# EAGLE board STM32F446 Full Board SMD v7.1 (EAGLE 9.6.2), part 1 of 2
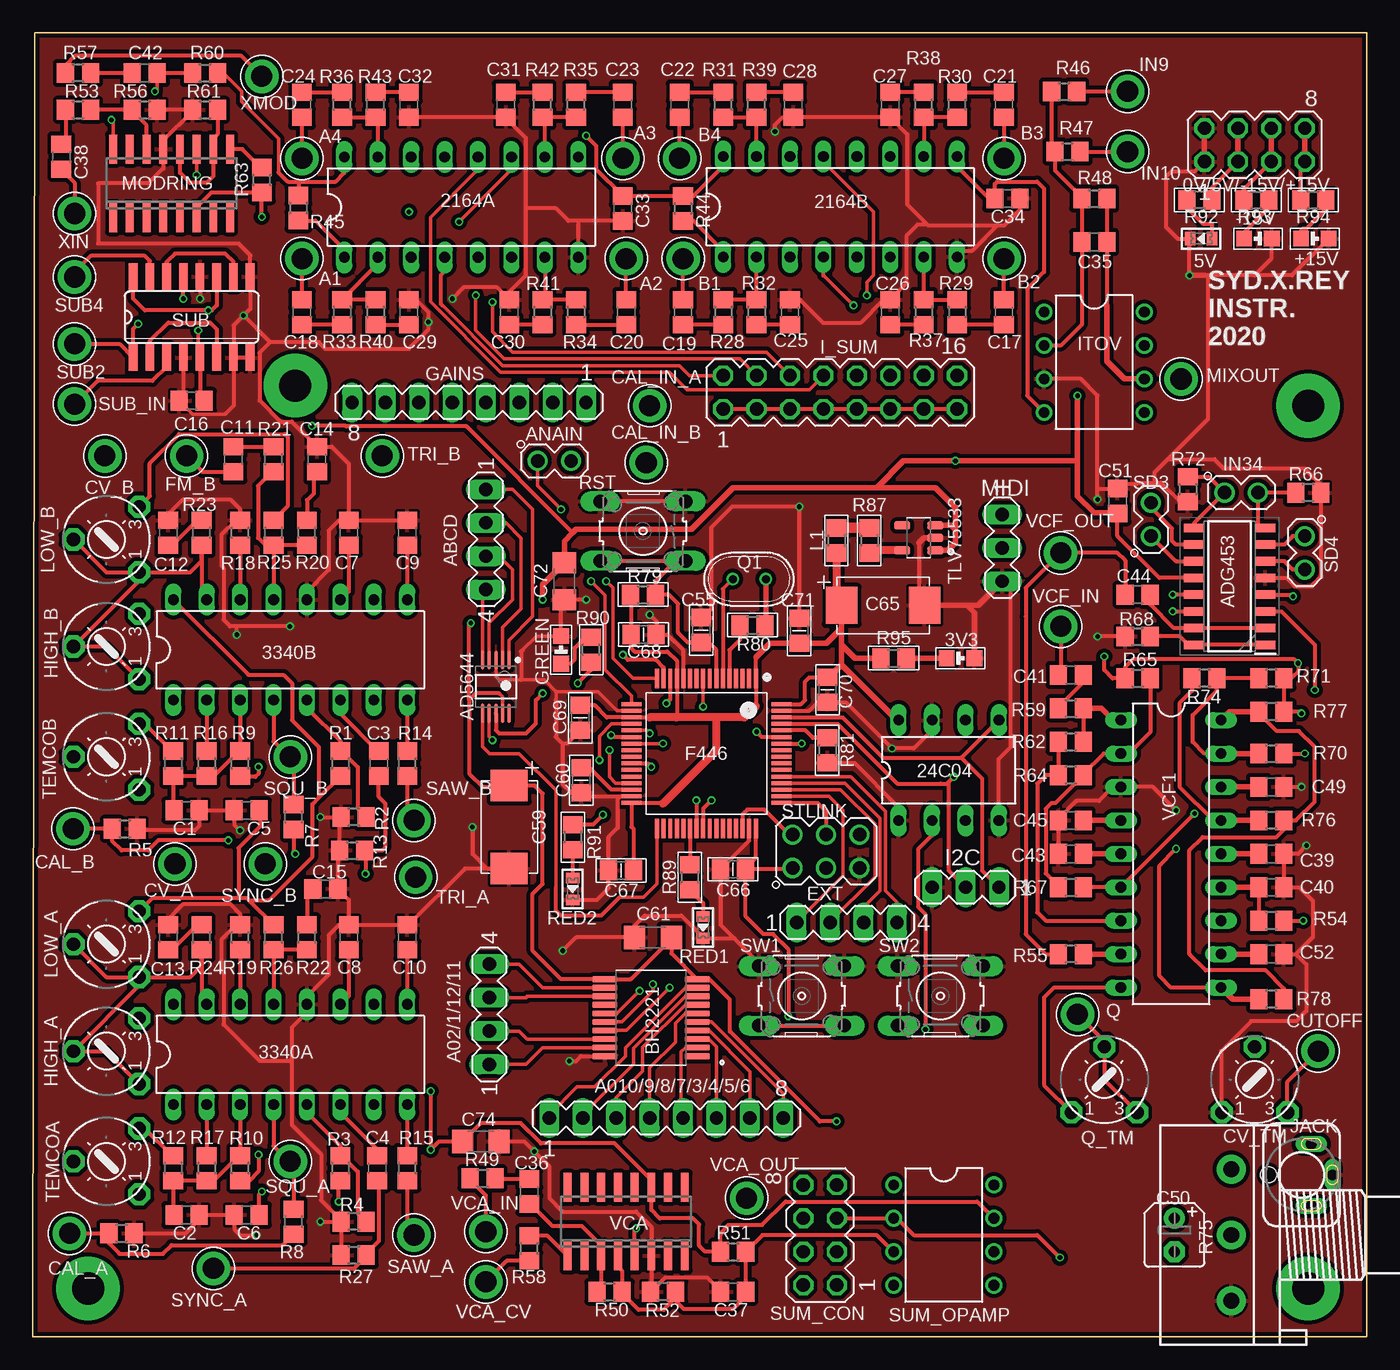
[diagram p0: board, top side]
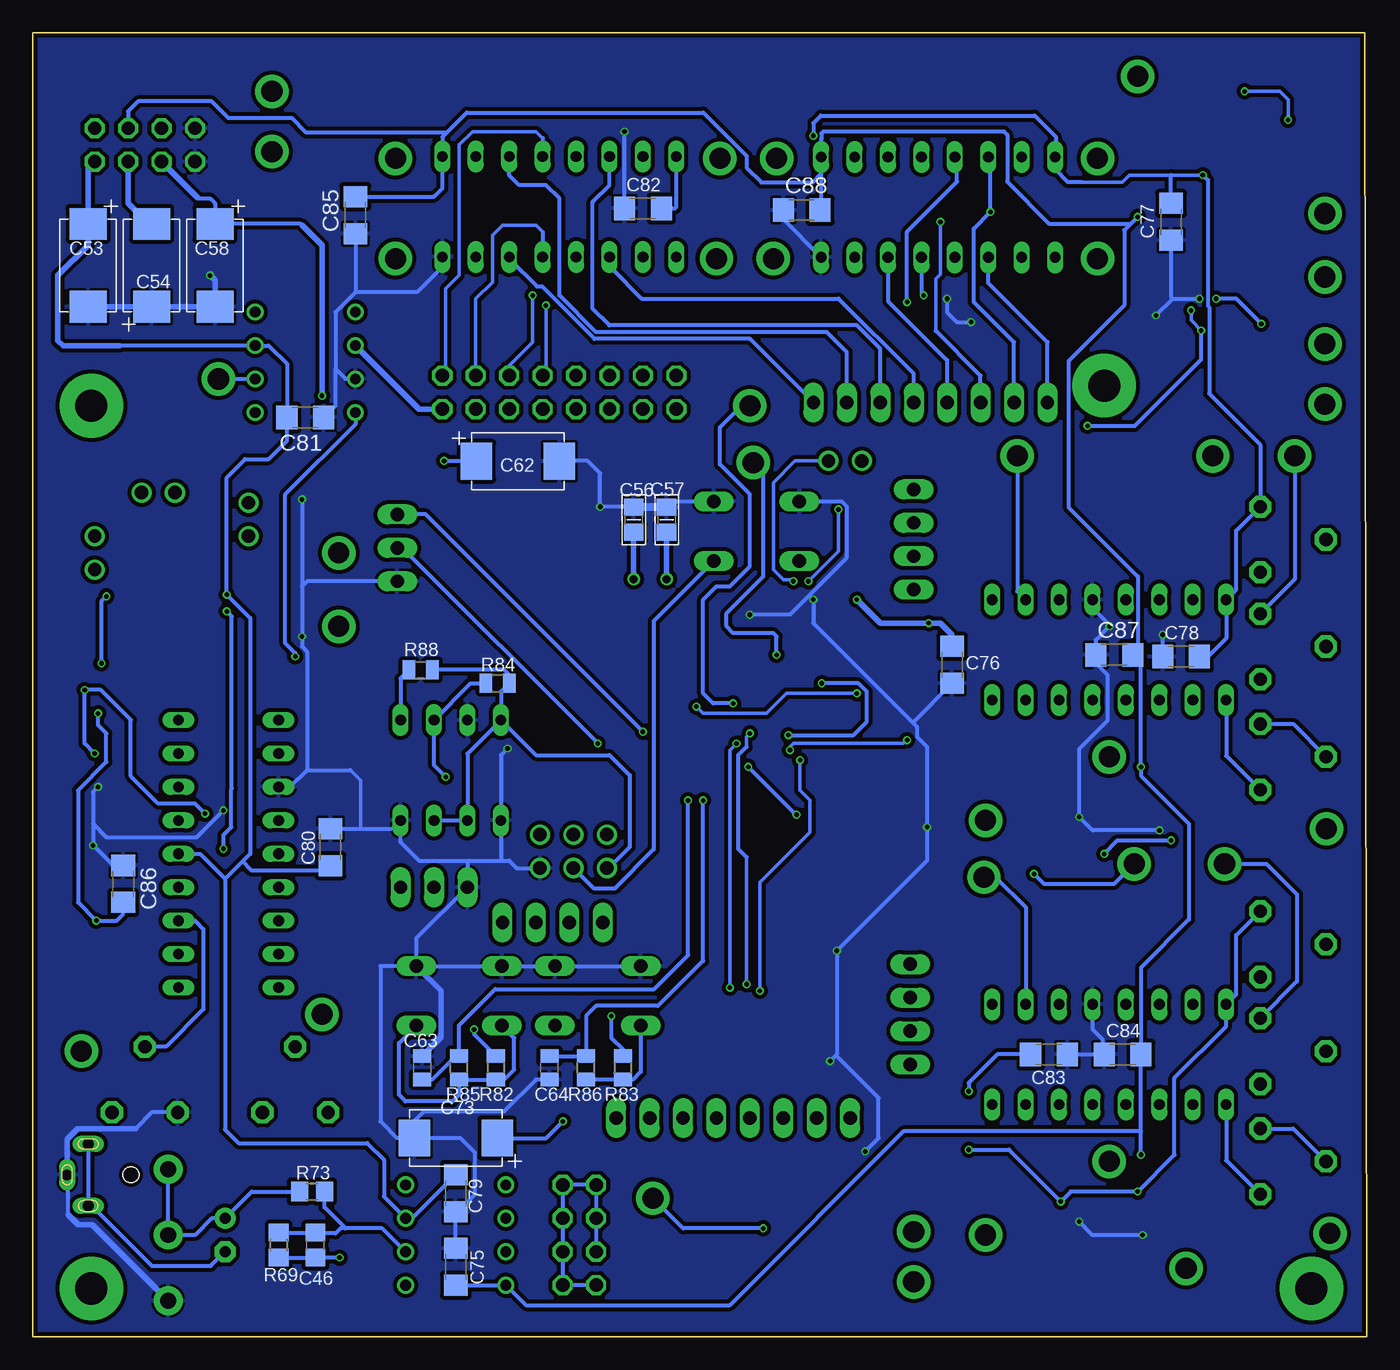
[diagram p1: board, bottom side, seen from below]

Size 101.35 x 99.06 mm. Coordinates in mm from the lower left corner, seen from the top.
Outline: 0,0 101.35,0 101.35,99.06 0.13,99.06 0,0
Copper layers (1*16): Top 0.018mm / dielectric 1.55mm / Bottom 0.018mm
Design rules "eC_2Layer_PClass6_BaseCopperO18_eCDefault": minimum track width 0.15mm, minimum drill 0.35mm, track to track 0.15mm, track to pad 0.15mm, pad to pad 0.15mm, via to via 0.15mm, smd to smd 0mil, copper to edge 0.25mm, drill to drill 0.35mm, minimum pad ring 0.175mm, minimum via ring 0.125mm, stop-mask expansion 0mil, vias tented up to drill 0.45mm, thermal gap 0.2mm

## Footprints (pad centres in the part's own frame; a part is rotated, then mirrored left to right if it is on the bottom)
MA04-2 = drill 1.016 octagon: 1 -3.81,-1.27; 2 -3.81,1.27; 3 -1.27,-1.27; 4 -1.27,1.27; 5 1.27,-1.27; 6 1.27,1.27; 7 3.81,-1.27; 8 3.81,1.27
0805-LED = smd 1.2 x 1.2: A -1.05,0; C 1.05,0
0603-LED = smd 0.8 x 1: A 0.825,0; C -0.825,0
DIL8 = drill 0.813 long: 1 -3.81,-3.81; 2 -1.27,-3.81; 3 1.27,-3.81; 4 3.81,-3.81; 5 3.81,3.81; 6 1.27,3.81; 7 -1.27,3.81; 8 -3.81,3.81
DIL16 = drill 0.813 long: 1 -8.89,-3.81; 2 -6.35,-3.81; 3 -3.81,-3.81; 4 -1.27,-3.81; 5 1.27,-3.81; 6 3.81,-3.81; 7 6.35,-3.81; 8 8.89,-3.81; 9 8.89,3.81; 10 6.35,3.81; 11 3.81,3.81; 12 1.27,3.81; 13 -1.27,3.81; 14 -3.81,3.81; 15 -6.35,3.81; 16 -8.89,3.81
TESTPOINT_63 = drill 1.6 pad 2.54: P$1 0,0
MA04-1 = drill 1.016 long: 1 -3.81,0; 2 -1.27,0; 3 1.27,0; 4 3.81,0
MA08-1 = drill 1.016 long: 1 -8.89,0; 2 -6.35,0; 3 -3.81,0; 4 -1.27,0; 5 1.27,0; 6 3.81,0; 7 6.35,0; 8 8.89,0
ANALOG_DEVICES_AD5644RBRMZ-5_0 = smd 1.45 x 0.25: 1 -2.025,1; 2 -2.025,0.5; 3 -2.025,0; 4 -2.025,-0.5; 5 -2.025,-1; 6 2.025,-1; 7 2.025,-0.5; 8 2.025,0; 9 2.025,0.5; 10 2.025,1
SOIC127P600X175-16N = smd 1.525 x 0.65: 1 -2.712,4.445; 2 -2.712,3.175; 3 -2.712,1.905; 4 -2.712,0.635; 5 -2.712,-0.635; 6 -2.712,-1.905; 7 -2.712,-3.175; 8 -2.712,-4.445; 9 2.712,-4.445; 10 2.712,-3.175; 11 2.712,-1.905; 12 2.712,-0.635; 13 2.712,0.635; 14 2.712,1.905; 15 2.712,3.175; 16 2.712,4.445
MA02-1 = drill 1.016: 1 -2.54,0; 2 0,0
SOP65P780X200-20N = smd 1.9 x 0.48: 1 -3.505,2.925; 2 -3.505,2.275; 3 -3.505,1.625; 4 -3.505,0.975; 5 -3.505,0.325; 6 -3.505,-0.325; 7 -3.505,-0.975; 8 -3.505,-1.625; 9 -3.505,-2.275; 10 -3.505,-2.925; 11 3.505,-2.925; 12 3.505,-2.275; 13 3.505,-1.625; 14 3.505,-0.975; 15 3.505,-0.325; 16 3.505,0.325; 17 3.505,0.975; 18 3.505,1.625; 19 3.505,2.275; 20 3.505,2.925
C0805 = smd 1.3 x 1.5: 1 -0.95,0; 2 0.95,0
B45181A = drill 0.813 pad 1.6: + -1.27,0 | drill 0.813 pad 1.6 octagon: - 1.27,0
CPOL2917 = smd 2.4 x 2.8: + -3.15,0; - 3.15,0
C1206 = smd 1.6 x 1.8: 1 -1.4,0; 2 1.4,0
C0805' = smd 1.016 x 1.422: 1 -0.889,0; 2 0.889,0
6MM = drill 1 pad 1.676 octagon: A -2.5,-2.5; E 2.5,-2.5; S 0,2.5
QFP50P1200X1200X160-64N = smd 1.5 x 0.3: 1 -5.7,3.75; 2 -5.7,3.25; 3 -5.7,2.75; 4 -5.7,2.25; 5 -5.7,1.75; 6 -5.7,1.25; 7 -5.7,0.75; 8 -5.7,0.25; 9 -5.7,-0.25; 10 -5.7,-0.75; 11 -5.7,-1.25; 12 -5.7,-1.75; 13 -5.7,-2.25; 14 -5.7,-2.75; 15 -5.7,-3.25; 16 -5.7,-3.75; 33 5.7,-3.75; 34 5.7,-3.25; 35 5.7,-2.75; 36 5.7,-2.25; 37 5.7,-1.75; 38 5.7,-1.25; 39 5.7,-0.75; 40 5.7,-0.25; 41 5.7,0.25; 42 5.7,0.75; 43 5.7,1.25; 44 5.7,1.75; 45 5.7,2.25; 46 5.7,2.75; 47 5.7,3.25; 48 5.7,3.75 | smd 0.3 x 1.5: 17 -3.75,-5.7; 18 -3.25,-5.7; 19 -2.75,-5.7; 20 -2.25,-5.7; 21 -1.75,-5.7; 22 -1.25,-5.7; 23 -0.75,-5.7; 24 -0.25,-5.7; 25 0.25,-5.7; 26 0.75,-5.7; 27 1.25,-5.7; 28 1.75,-5.7; 29 2.25,-5.7; 30 2.75,-5.7; 31 3.25,-5.7; 32 3.75,-5.7; 49 3.75,5.7; 50 3.25,5.7; 51 2.75,5.7; 52 2.25,5.7; 53 1.75,5.7; 54 1.25,5.7; 55 0.75,5.7; 56 0.25,5.7; 57 -0.25,5.7; 58 -0.75,5.7; 59 -1.25,5.7; 60 -1.75,5.7; 61 -2.25,5.7; 62 -2.75,5.7; 63 -3.25,5.7; 64 -3.75,5.7
HOLES_096-PAD-NS = drill 2.438 pad 4.826: B096 0,0
MA03-1 = drill 1.016 long: 1 -2.54,0; 2 0,0; 3 2.54,0
MA08-2 = drill 1.016 octagon: 1 -8.89,-1.27; 2 -8.89,1.27; 3 -6.35,-1.27; 4 -6.35,1.27; 5 -3.81,-1.27; 6 -3.81,1.27; 7 -1.27,-1.27; 8 -1.27,1.27; 9 1.27,-1.27; 10 1.27,1.27; 11 3.81,-1.27; 12 3.81,1.27; 13 6.35,-1.27; 14 6.35,1.27; 15 8.89,-1.27; 16 8.89,1.27
DIL08 = drill 0.813 pad 1.27: 1 -3.81,-3.81; 2 -1.27,-3.81; 3 1.27,-3.81; 4 3.81,-3.81; 5 3.81,3.81; 6 1.27,3.81; 7 -1.27,3.81; 8 -3.81,3.81
1502_01 = drill 0.8 pad 1.2 long: 1 0,2.35; 2 -2.35,0.75; 3 2.35,0.75 | hole 1.2: 0,-2.5
L0805 = smd 1.3 x 1.5: 1 -0.95,0; 2 0.95,0
SO16 = smd 0.6 x 2.2: 1 -4.445,-2.6; 2 -3.175,-2.6; 3 -1.905,-2.6; 4 -0.635,-2.6; 5 0.635,-2.6; 6 1.905,-2.6; 7 3.175,-2.6; 8 4.445,-2.6; 9 4.445,2.6; 10 3.175,2.6; 11 1.905,2.6; 12 0.635,2.6; 13 -0.635,2.6; 14 -1.905,2.6; 15 -3.175,2.6; 16 -4.445,2.6
Q-HC-46X = drill 0.61: 1 -1.25,0; 2 1.25,0
R0805 = smd 1.3 x 1.5: 1 -0.95,0; 2 0.95,0
3RP/1610N = drill 1.2 pad 2.184: 1 -5,0; 2 0,0; 3 5,0
R0805' = smd 1.016 x 1.422: 1 -0.889,0; 2 0.889,0
B3F-10XX = drill 1.016 long: 1 -3.251,2.261; 2 3.251,2.261; 3 -3.251,-2.261; 4 3.251,-2.261
MA03-2 = drill 1.016: 1 -2.54,-1.27; 2 -2.54,1.27; 3 0,-1.27; 4 0,1.27; 5 2.54,-1.27; 6 2.54,1.27
SO16' = smd 0.66 x 2.032: 1 -4.445,-3.073; 2 -3.175,-3.073; 3 -1.905,-3.073; 4 -0.635,-3.073; 5 0.635,-3.073; 6 1.905,-3.073; 7 3.175,-3.073; 8 4.445,-3.073; 9 4.445,3.073; 10 3.175,3.073; 11 1.905,3.073; 12 0.635,3.073; 13 -0.635,3.073; 14 -1.905,3.073; 15 -3.175,3.073; 16 -4.445,3.073
SOT95P280X145-5N = smd 1.21 x 0.59: 1 -1.255,0.95; 2 -1.255,0; 3 -1.255,-0.95; 4 1.255,-0.95; 5 1.255,0.95
DIL18 = drill 0.813 long: 1 -10.16,-3.81; 2 -7.62,-3.81; 3 -5.08,-3.81; 4 -2.54,-3.81; 5 0,-3.81; 6 2.54,-3.81; 7 5.08,-3.81; 8 7.62,-3.81; 9 10.16,-3.81; 10 10.16,3.81; 11 7.62,3.81; 12 5.08,3.81; 13 2.54,3.81; 14 0,3.81; 15 -2.54,3.81; 16 -5.08,3.81; 17 -7.62,3.81; 18 -10.16,3.81

## Placement (x,y rotation side)
0V/5V/-15V/+15V  [MA04-2]  92.84,90.55 0 top
3V3  [0805-LED]  70.48,51.56 0 top
5V  [0603-LED]  88.77,83.44 0 top
24C04  24C04AP  [DIL8]  69.6,43.05 0 top
2164A  SSM2164  [DIL16]  32.56,85.82 0 top
2164B  SSM2164  [DIL16]  61.34,85.85 0 top
3340A  CEM3340  [DIL16]  19.56,21.46 0 top
3340B  CEM3340  [DIL16]  19.56,52.2 0 top
+15V  [0805-LED]  97.41,83.44 0 top
-15V  [0805-LED]  93.09,83.44 180 top
A1  T  [TESTPOINT_63]  20.45,81.92 0 top
A2  T  [TESTPOINT_63]  45.09,81.92 0 top
A02/1/12/11  [MA04-1]  34.67,24.51 90 top
A3  T  [TESTPOINT_63]  44.83,89.54 0 top
A4  T  [TESTPOINT_63]  20.45,89.54 0 top
A010/9/8/7/3/4/5/6  [MA08-1]  48.13,16.64 0 top
ABCD  [MA04-1]  34.42,60.58 270 top
AD5644  ANALOG_DEVICES_AD5644RBRMZ-5ANALOG_DEVICES_AD5644RBRMZ-5_0_0  [ANALOG_DEVICES_AD5644RBRMZ-5_0]  35.18,49.4 270 top
ADG453  ADG453BRZ  [SOIC127P600X175-16N]  90.93,57.02 180 top
ANAIN  [MA02-1]  40.89,66.55 0 top
B1  T  [TESTPOINT_63]  49.4,81.92 0 top
B2  T  [TESTPOINT_63]  73.79,81.92 0 top
B3  T  [TESTPOINT_63]  73.79,89.54 0 top
B4  T  [TESTPOINT_63]  49.15,89.54 0 top
BH2221  BH2221FV  [SOP65P780X200-20N]  46.96,24.26 180 top
C1  100n  [C0805]  11.68,40 180 top
C2  100n  [C0805]  11.68,9.27 180 top
C3  1n  [C0805]  26.29,43.56 90 top
C4  1n  [C0805]  26.16,12.83 90 top
C5  100n  [C0805]  16.26,40 0 top
C6  100n  [C0805]  16.26,9.27 0 top
C7  1n  [C0805]  24,61.09 270 top
C8  1n  [C0805]  24,30.35 270 top
C9  100n  [C0805]  28.45,61.09 270 top
C10  100n  [C0805]  28.45,30.35 270 top
C11  100n  [C0805]  15.24,66.68 270 top
C12  10n  [C0805]  10.29,61.09 270 top
C13  10n  [C0805]  10.29,30.35 270 top
C14  10n  [C0805]  21.59,66.68 90 top
C15  10n  [C0805]  22.22,34.04 0 top
C16  100n  [C0805]  12.07,71.12 180 top
C17  470n  [C0805]  73.79,77.85 270 top
C18  470n  [C0805]  20.45,77.85 270 top
C19  470n  [C0805]  49.4,77.85 270 top
C20  470n  [C0805]  45.09,77.85 270 top
C21  470n  [C0805]  73.79,93.6 90 top
C22  470n  [C0805]  49.15,93.6 90 top
C23  470n  [C0805]  44.83,93.6 90 top
C24  470n  [C0805]  20.45,93.6 90 top
C25  560p  [C0805]  57.53,77.85 270 top
C26  560p  [C0805]  65.15,77.85 270 top
C27  560p  [C0805]  65.15,93.6 90 top
C28  560p  [C0805]  57.79,93.6 90 top
C29  560p  [C0805]  28.57,77.85 270 top
C30  560p  [C0805]  36.2,77.85 270 top
C31  560p  [C0805]  35.94,93.6 90 top
C32  560p  [C0805]  28.57,93.6 90 top
C33  100n  [C0805]  44.83,85.73 90 top
C34  100n  [C0805]  74.04,86.49 0 top
C35  100p  [C0805]  80.64,83.19 0 top
C36  4.7u  [C0805]  37.72,11.05 90 top
C37  4.7u  [C0805]  53.21,3.43 180 top
C38  4.7u  [C0805]  2.16,89.66 270 top
C39  100n  [C0805]  94.11,36.7 180 top
C40  100n  [C0805]  94.11,34.16 0 top
C41  470n  [C0805]  78.87,50.29 180 top
C42  1u  [C0805]  8.51,96.01 180 top
C43  300p  [C0805]  78.87,36.7 0 top
C44  1u  [C0805]  83.95,56.39 180 top
C45  300p  [C0805]  78.87,39.24 0 top
C46  100p  [C0805]  79.88,6.99 270 bottom
C49  300p  [C0805]  94.11,41.78 180 top
C50  22u  [B45181A]  86.74,7.75 270 top
C51  100n  [C0805]  82.42,63.5 90 top
C52  300p  [C0805]  94.11,29.08 180 top
C53  10u  [CPOL2917]  97.16,81.41 270 bottom
C54  10u  [CPOL2917]  92.33,81.41 90 bottom
C55  0.1uF  [C0805]  50.78,53.7 270 top
C56  12pF  [C0805]  55.69,62.07 270 bottom
C57  12pF  [C0805]  53.19,62.07 270 bottom
C58  10u  [CPOL2917]  87.5,81.41 270 bottom
C59  10u  [CPOL2917]  36.2,38.73 270 top
C60  2.2uF  [C0805]  41.68,42.3 90 top
C61  100n  [C1206]  47.12,30.35 0 top
C62  10u  [CPOL2917]  64.48,66.52 0 bottom
C63  100n  [C0805']  71.75,20.45 90 bottom
C64  100n  [C0805']  62.1,20.45 270 bottom
C65  100 uF  [CPOL2917]  64.61,55.57 0 top
C66  0.1uF  [C0805]  53.2,35.53 0 top
C67  0.1uF  [C0805]  44.69,35.45 0 top
C68  0.1uF  [C0805]  46.4,53.36 180 top
C69  0.1uF  [C0805]  41.6,47.02 90 top
C70  0.1uF  [C0805]  60.38,49.16 90 top
C71  1.0uF  [C0805]  58.24,53.64 270 top
C72  100n  [C1206]  40.39,57.4 90 top
C73  10u  [CPOL2917]  69.21,15.11 180 bottom
C74  1u  [C1206]  34.04,14.86 180 top
C75  1u  [C1206]  69.21,5.33 270 bottom
C76  1u  [C1206]  31.5,51.05 90 bottom
C77  1u  [C1206]  14.86,84.71 90 bottom
C78  1u  [C1206]  14.1,51.69 0 bottom
C79  1u  [C1206]  69.21,10.92 90 bottom
C80  1u  [C1206]  78.74,37.21 270 bottom
C81  1u  [C1206]  80.64,69.85 180 bottom
C82  1u  [C1206]  54.99,85.73 0 bottom
C83  1u  [C1206]  24.13,21.46 180 bottom
C84  1u  [C1206]  18.54,21.46 0 bottom
C85  1u  [C1206]  76.83,85.22 90 bottom
C86  1u  [C1206]  94.49,34.42 270 bottom
C87  1u  [C1206]  19.18,51.82 0 bottom
C88  1u  [C1206]  42.93,85.6 0 bottom
CAL_A  SYNC_IN  [TESTPOINT_63]  2.79,7.87 90 top
CAL_B  CALIB B  [TESTPOINT_63]  3.05,38.61 90 top
CAL_IN_A  [TESTPOINT_63]  46.86,70.74 0 top
CAL_IN_B  [TESTPOINT_63]  46.61,66.42 0 top
CUTOFF  [TESTPOINT_63]  97.66,21.72 0 top
CV_A  CV  [TESTPOINT_63]  10.79,35.94 90 top
CV_B  CV  [TESTPOINT_63]  5.46,66.93 90 top
CV_TM  100k  [6MM]  92.84,19.56 0 top
EXT  [MA04-1]  61.85,31.5 0 top
F446  STM32F446RCT7  [QFP50P1200X1200X160-64N]  51.18,44.32 270 top
FM_B  FMLIN  [TESTPOINT_63]  11.68,66.93 90 top
GAINS  GAIN_CTRL  [MA08-1]  33.15,70.99 180 top
GREEN  [0805-LED]  40.13,52.2 90 top
HIGH_A  100k  [6MM]  5.59,21.72 90 top
HIGH_B  100k  [6MM]  5.59,52.45 90 top
HOLE1  HOLES_MOUNT-PAD-ROUND-0.096-NS  [HOLES_096-PAD-NS]  96.9,70.74 0 top
HOLE2  HOLES_MOUNT-PAD-ROUND-0.096-NS  [HOLES_096-PAD-NS]  4.19,3.68 0 top
HOLE3  HOLES_MOUNT-PAD-ROUND-0.096-NS  [HOLES_096-PAD-NS]  96.9,3.68 0 top
HOLE4  HOLES_MOUNT-PAD-ROUND-0.096-NS  [HOLES_096-PAD-NS]  19.94,72.26 0 top
I2C  [MA03-1]  70.87,34.16 180 top
I_SUM  ITOV  [MA08-2]  61.34,71.76 0 top
IN9  [TESTPOINT_63]  83.19,94.62 0 top
IN10  [TESTPOINT_63]  83.19,90.04 0 top
IN34  IN34  [MA02-1]  93.09,64.14 0 top
ITOV  NE5534AN  [DIL08]  80.64,74.04 270 top
JACK  1502_01  [1502_01]  96.39,12.32 270 top
L1  1 uH  [L0805]  61.06,60.5 270 top
LOW_A  100k  [6MM]  5.59,29.85 90 top
LOW_B  100k  [6MM]  5.59,60.58 90 top
MIDI  [MA03-1]  73.66,59.94 270 top
MIXOUT  [TESTPOINT_63]  87.25,72.77 0 top
MODRING  LM13700M  [SO16]  10.54,87.63 0 top
Q  [TESTPOINT_63]  79.38,24.51 0 top
Q1  16MHz  [Q-HC-46X]  54.44,57.57 180 top
Q_TM  100k  [6MM]  81.41,19.56 0 top
R1  330k  [R0805]  23.37,43.56 270 top
R2  68k  [R0805]  24.38,39.5 180 top
R3  330k  [R0805]  23.37,12.83 270 top
R4  68k  [R0805]  24.38,8.76 180 top
R5  10k  [R0805]  6.98,38.61 0 top
R6  10k  [R0805]  6.73,7.87 0 top
R7  33k  [R0805]  19.81,39.5 90 top
R8  33k  [R0805]  19.81,8.76 90 top
R9  820  [R0805]  15.75,43.56 90 top
R10  820  [R0805]  15.75,12.83 90 top
R11  24k  [R0805]  10.67,43.56 270 top
R12  24k  [R0805]  10.67,12.83 270 top
R13  470k  [R0805]  24.26,36.96 0 top
R14  5.6k  [R0805]  28.45,43.56 90 top
R15  5.6k  [R0805]  28.45,12.83 90 top
R16  5.6k  [R0805]  13.21,43.56 270 top
R17  5.6k  [R0805]  13.21,12.83 270 top
R18  1.8k  [R0805]  15.75,61.09 90 top
R19  1.8k  [R0805]  15.75,30.35 90 top
R20  470  [R0805]  20.83,61.09 90 top
R21  1M  [R0805]  18.29,66.68 90 top
R22  470  [R0805]  20.83,30.35 90 top
R23  470  [R0805]  12.83,61.09 90 top
R24  470  [R0805]  12.83,30.35 90 top
R25  1.5M  [R0805]  18.29,61.09 90 top
R26  1.5M  [R0805]  18.29,30.35 90 top
R27  470k  [R0805]  24.38,6.22 0 top
R28  27k  [R0805]  52.45,77.85 270 top
R29  27k  [R0805]  70.23,77.85 270 top
R30  27k  [R0805]  70.23,93.6 90 top
R31  27k  [R0805]  52.45,93.6 90 top
R32  470  [R0805]  54.99,77.85 270 top
R33  27k  [R0805]  23.49,77.85 270 top
R34  27k  [R0805]  41.28,77.85 270 top
R35  27k  [R0805]  41.28,93.6 90 top
R36  27k  [R0805]  23.49,93.6 90 top
R37  470  [R0805]  67.69,77.85 270 top
R38  470  [R0805]  67.69,93.6 90 top
R39  470  [R0805]  54.99,93.6 90 top
R40  470  [R0805]  26.04,77.85 270 top
R41  470  [R0805]  38.73,77.85 270 top
R42  470  [R0805]  38.73,93.6 90 top
R43  470  [R0805]  26.04,93.6 90 top
R44  8.2k  [R0805]  49.4,85.73 270 top
R45  8.2k  [R0805]  20.18,85.76 270 top
R46  27k  [R0805]  78.36,94.62 0 top
R47  27k  [R0805]  78.61,90.04 0 top
R48  33K  [R0805]  80.64,86.49 0 top
R49  100k  [R0805]  34.16,12.06 0 top
R50  1k  [R0805]  43.82,3.43 0 top
R51  10k  [R0805]  53.21,6.48 0 top
R52  10k  [R0805]  47.88,3.43 180 top
R53  100k  [R0805]  3.43,93.22 0 top
R54  1.5k  [R0805]  94.11,31.62 180 top
R55  51k  [R0805]  78.87,29.08 180 top
R56  1k  [R0805]  8.51,93.22 0 top
R57  4.7k  [R0805]  3.43,96.01 180 top
R58  27k  [R0805]  37.72,6.73 90 top
R59  91k  [R0805]  78.87,47.75 0 top
R60  47k  [R0805]  13.08,96.01 0 top
R61  22k  [R0805]  13.08,93.22 0 top
R62  100k  [R0805]  78.87,45.21 0 top
R63  10k  [R0805]  17.4,87.88 90 top
R64  91k  [R0805]  78.87,42.67 180 top
R65  220k  [R0805]  83.95,50.04 0 top
R66  100k  [R0805]  96.9,64.14 180 top
R67  100k  [R0805]  78.87,34.16 0 top
R68  100k  [R0805]  83.95,53.21 0 top
R69  47k  [R0805]  82.68,6.99 270 bottom
R70  91k  [R0805]  94.11,44.32 0 top
R71  220k  [R0805]  94.11,50.04 180 top
R72  100k  [R0805]  87.76,64.39 270 top
R73  470  [R0805]  80.14,11.05 0 bottom
R74  100k  [R0805]  89.03,50.04 180 top
R75  100kB  [3RP/1610N]  91.06,7.75 90 top
R76  91k  [R0805]  94.11,39.24 180 top
R77  220k  [R0805]  94.11,47.5 180 top
R78  100k  [R0805]  94.11,25.65 180 top
R79  100k  [R0805]  46.36,56.39 0 top
R80  100  [R0805]  54.69,54.07 0 top
R81  10K  [R0805]  60.37,44.57 270 top
R82  10k  [R0805']  66.17,20.45 270 bottom
R83  10k  [R0805']  56.52,20.45 270 bottom
R84  1k  [R0805']  66.04,49.66 0 bottom
R85  10k  [R0805']  68.96,20.45 90 bottom
R86  10k  [R0805']  59.31,20.45 90 bottom
R87  1  [R0805]  63.56,60.5 270 top
R88  1k  [R0805']  71.88,50.67 0 bottom
R89  180  [R0805]  49.91,34.92 270 top
R90  1k  [R0805]  42.42,52.2 90 top
R91  180  [R0805]  41.02,37.97 270 top
R92  470  [R0805]  88.65,86.36 180 top
R93  10k  [R0805]  92.96,86.36 0 top
R94  10k  [R0805]  97.28,86.36 0 top
R95  1k  [R0805]  65.41,51.56 0 top
RED1  [0603-LED]  50.93,31.12 90 top
RED2  [0603-LED]  41.02,34.04 90 top
RST  [B3F-10XX]  46.36,61.21 180 top
SAW_A  S  [TESTPOINT_63]  28.96,7.75 270 top
SAW_B  S  [TESTPOINT_63]  28.96,39.24 270 top
SD3  SD3  [MA02-1]  84.96,63.37 90 top
SD4  SD4  [MA02-1]  96.65,58.29 270 top
SQU_A  P  [TESTPOINT_63]  19.56,13.33 270 top
SQU_B  P  [TESTPOINT_63]  19.56,44.07 270 top
STLINK  75867-331LF  [MA03-2]  60.27,36.89 0 top
SUB  4027D  [SO16']  12.07,77.47 0 top
SUB2  T  [TESTPOINT_63]  3.17,75.44 90 top
SUB4  T  [TESTPOINT_63]  3.17,80.52 90 top
SUB_IN  T  [TESTPOINT_63]  3.17,70.87 90 top
SUM_CON  [MA04-2]  59.82,7.75 90 top
SUM_OPAMP  NE5534AN  [DIL08]  69.21,7.75 270 top
SW1  [B3F-10XX]  58.42,25.91 0 top
SW2  [B3F-10XX]  68.96,25.91 0 top
SYNC_A  SYNC_IN  [TESTPOINT_63]  13.72,5.21 180 top
SYNC_B  SYNC_IN  [TESTPOINT_63]  17.65,35.94 90 top
TEMCOA  10k  [6MM]  5.59,13.33 90 top
TEMCOB  10k  [6MM]  5.59,44.07 90 top
TLV75533  TLV75533PDBVR  [SOT95P280X145-5N]  67.31,60.71 180 top
TRI_A  T  [TESTPOINT_63]  29.08,34.92 180 top
TRI_B  T  [TESTPOINT_63]  26.54,66.93 180 top
VCA  LM13700M  [SO16]  45.09,8.76 0 top
VCA_CV  [TESTPOINT_63]  34.42,4.19 0 top
VCA_IN  [TESTPOINT_63]  34.42,8 0 top
VCA_OUT  [TESTPOINT_63]  54.23,10.54 0 top
VCF1  AS3320  [DIL18]  86.49,36.7 270 top
VCF_IN  [TESTPOINT_63]  78.1,53.97 0 top
VCF_OUT  [TESTPOINT_63]  78.1,59.56 0 top
XIN  [TESTPOINT_63]  3.17,85.34 0 top
XMOD  [TESTPOINT_63]  17.4,95.76 0 top

## Library data of the parts
0V/5V/-15V/+15V A02/1/12/11 A010/9/8/7/3/4/5/6 ABCD EXT GAINS I2C I_SUM MIDI SUM_CON = con-lstb; OC_FARNELL: unknown; OC_NEWARK: unknown
3V3 5V +15V -15V GREEN RED1 RED2 = Passives
24C04 = microchip; MF: RAMTRON INTERNATIONAL CORP; MPN: FM24C04A-P; OC_FARNELL: 1094258; OC_NEWARK: 97H6447
2164A 2164B 3340A 3340B VCF1 = analog-audio-chips
A1-A4 B1-B4 C63 C64 CAL_A CAL_B CAL_IN_A CAL_IN_B CUTOFF CV_A CV_B FM_B IN9 IN10 MIXOUT Q R82-R86 R88 SAW_A SAW_B SQU_A SQU_B SUB2 SUB4 SUB_IN SYNC_A SYNC_B TRI_A TRI_B VCA_CV VCA_IN VCA_OUT VCF_IN VCF_OUT XIN XMOD = 6P1_EVB
AD5644 = Analog Devices - AD5644RBRMZ-5; CIIVA_IDS: 963927; COMPONENT_LINK_1_DESCRIPTION: Manufacturer URL; COMPONENT_LINK_1_URL: http://www.analog.com/en/index.html; COMPONENT_LINK_3_DESCRIPTION: Package Specification; COMPONENT_LINK_3_URL: http://www.analog.com/static/imported-files/packages/PKG_PDF/MSOP%28RM%29/RM_10.pdf; COMPONENT_LINK_4_DESCRIPTION: Product URL; COMPONENT_LINK_4_URL: http://www.analog.com/en/digital-to-analog-converters/da-converters/ad5644r/products/product.html; DAC_OUTPUTS: 4; DATASHEET: http://www.analog.com/static/imported-files/data_sheets/AD5624R_5644R_5664R.pdf; DATASHEET_VERSION: Rev.B; FOOTPRINT_VARIANT_NAME_0: Level C; FOOTPRINT_VARIANT_NAME_1: Level B; FOOTPRINT_VARIANT_NAME_2: Level A; IMPORTED: yes; IMPORTED_FROM: vault; IMPORT_TS: 1521855052; MAX_V: 5.5V; MF: Analog Devices; MOUNTING_TECHNOLOGY: Surface Mount; MPN: AD5644RBRMZ-5; OP_PWR_DISS: 6.6mW; PACKAGE: RM-10; PACKAGE_DESCRIPTION: 10-Lead Mini Small Outline Package [MSOP]; PACKAGE_VERSION: May-2005; PACKING: Tube; PIN_0_0_6_INSIDE_EDGE: clock; PREFIX: U; RELEASE_DATE: 1387041291; RESOLUTION_BITS: 14; ROHS: Yes; SETTLING_TIME: 3.5Âμs; SINGLE_SUPPLY: Yes; VAULT_GUID: 80AB4FD1-89D4-49BA-A3F3-5D59DB24CB1A; VAULT_REVISION: 6F701BB3-0F34-4771-8D13-1575DC664D0F
ADG453 = ADG453BRZ; DESCRIPTION: Analog Devices ADG453BRZ, Analogue SPST Switch Quad SPST, 9 V, 16-Pin SOIC; HEIGHT: 1.75mm; MANUFACTURER_NAME: Analog Devices; MANUFACTURER_PART_NUMBER: ADG453BRZ; MOUSER_PART_NUMBER: 584-ADG453BRZ; MOUSER_PRICE-STOCK: https://www.mouser.com/Search/Refine.aspx?Keyword=584-ADG453BRZ; RS_PART_NUMBER: 0412539P; RS_PRICE-STOCK: http://uk.rs-online.com/web/p/products/0412539P
ANAIN IN34 SD3 SD4 = stm32_pi_board
BH2221 = BH2221FV
C1-C16 C25-C34 C36-C46 C49 C51 C52 C61 C72 C74-C88 = rcl; SPICEPREFIX: C
C17-C24 C35 = rcl; C3: 0.47 micro; SPICEPREFIX: C
C50 = resistor
C53 C54 C58 C59 C62 C65 C73 = MyComponents; MOUSER: 581-TPSE477K010R0200
C55-C57 C60 C66-C71 = MyComponents; MOUSER: 80-C0805C104J5RAUTO
CV_TM HIGH_A HIGH_B LOW_A LOW_B Q_TM TEMCOA TEMCOB = adafruit
F446 = STM32F446RCT7; AVAILABILITY: Unavailable; DESCRIPTION: ARM® Cortex®-M4 STM32F4 Microcontroller IC 32-Bit 180MHz 256KB (256K x 8) FLASH 64-LQFP (10x10); DIGIKEY-PURCHASE-URL: https://snapeda.com/shop?store=DigiKey&id=703054; MF: STMicroelectronics; MP: STM32F446RCT7; PACKAGE: LQFP-64 STMicroelectronics; PRICE: None
HOLE1-HOLE4 = 52101-101-REV-A; BOM: EXCLUDE
ITOV SUM_OPAMP = linear
JACK = con-lumberg; OC_FARNELL: 4739747; OC_NEWARK: unknown
L1 = MyComponents; MOUSER: 963-CKP2012N1R0M-T
MODRING VCA = ota
Q1 = MyComponents; MOUSER: 520-160-20-46X
R1-R74 R76-R78 = rcl; SPICEPREFIX: R
R75 = pot
R79-R81 R87 R89-R95 = MyComponents; MOUSER: 660-RK73H2ATTDD1R00F
RST SW1 SW2 = switch-omron; MPN: B3F-1000; OC_FARNELL: 176432; OC_NEWARK: 36M3542
STLINK = MyComponents; MOUSER: 649-75867-331LF
SUB = 40xx
TLV75533 = TLV75533PDBVR; AVAILABILITY: Unavailable; DESCRIPTION: Linear Voltage Regulator IC 1 Output 500mA SOT-23-5; MF: Texas Instruments; MP: TLV75533PDBVR; PACKAGE: SOT-23 Texas Instruments; PRICE: None

## Nets
3V3: 24C04.2 24C04.3 24C04.8 C65.+ C66.2 C67.2 C68.2 C69.2 C70.2 C71.2 F446.1 F446.13 F446.19 F446.32 F446.48 F446.64 L1.2 R79.1 R82.1 R83.1 R84.2 R88.2 R95.1 STLINK.1
5V: 0V/5V/-15V/+15V.3 0V/5V/-15V/+15V.4 AD5644.9 ADG453.12 BH2221.10 BH2221.11 C16.1 C51.1 C58.+ C59.+ C61.2 C62.+ C72.2 C73.+ C76.2 R92.1 SUB.5 SUB.11 SUB.16 TLV75533.1 TLV75533.3
2164_IN1_MIXA: 2164A.2 R33.1 R40.1
2164_IN2_MIXA: 2164A.7 R34.1 R41.1
2164_IN2_MIXB: 2164B.7 R29.1 R37.1
2164_IN3_MIXA: 2164A.10 R35.1 R42.1
2164_IN3_MIXB: 2164B.10 R30.1 R38.1
2164_IN4_MIXA: 2164A.15 R36.1 R43.1
2164_IN4_MIXB: 2164B.15 R31.1 R39.1
2164_IN4_MIXB1: 2164B.2 R28.1 R32.1
2164_MODE_MIXB: 2164B.1 R44.2
2164_OUT2_MIXA: 2164A.5 I_SUM.4
2164_OUT2_MIXB: 2164B.5 I_SUM.14
2164_OUT3_MIXA: 2164A.12 I_SUM.8
2164_OUT3_MIXB: 2164B.12 I_SUM.16
2164_OUT4_MIXA: 2164A.13 I_SUM.6
2164_OUT4_MIXB: 2164B.13 I_SUM.12
+15V: 0V/5V/-15V/+15V.7 0V/5V/-15V/+15V.8 2164A.16 2164B.16 3340A.16 3340B.16 ADG453.13 C5.2 C6.2 C33.2 C39.2 C53.+ C74.2 C77.2 C78.2 C79.2 C80.2 C81.2 C82.2 C83.2 ITOV.7 LOW_A.E LOW_B.E MODRING.11 R1.2 R3.2 R25.2 R26.2 R44.1 R45.1 R51.1 R60.2 R94.1 SUM_OPAMP.7 VCA.11 VCF1.14
-15V: 0V/5V/-15V/+15V.5 0V/5V/-15V/+15V.6 2164A.9 2164B.9 ADG453.4 C34.1 C54.- C75.2 C84.2 C85.2 C86.2 C87.2 C88.2 ITOV.4 MODRING.6 R9.1 R10.1 R54.1 R63.1 R65.1 R71.1 R77.1 R93.1 SUM_OPAMP.4
AD5644_CLK: AD5644.7 F446.29
AD5644_DI: AD5644.8 F446.9
AD5644_SYNC: AD5644.6 F446.33
BH2221_AO1: A02/1/12/11.2 BH2221.18
BH2221_AO2: A02/1/12/11.1 BH2221.19
BH2221_AO3: A010/9/8/7/3/4/5/6.5 BH2221.2
BH2221_AO4: A010/9/8/7/3/4/5/6.6 BH2221.3
BH2221_AO6: A010/9/8/7/3/4/5/6.8 BH2221.5
BH2221_AO7: A010/9/8/7/3/4/5/6.4 BH2221.6
BH2221_AO8: A010/9/8/7/3/4/5/6.3 BH2221.7
BH2221_AO9: A010/9/8/7/3/4/5/6.2 BH2221.8
BH2221_AO10: A010/9/8/7/3/4/5/6.1 BH2221.9
BH2221_AO11: A02/1/12/11.4 BH2221.12
BH2221_AO12: A02/1/12/11.3 BH2221.13
BH2221_CLK: BH2221.16 F446.21
BH2221_DI: BH2221.17 F446.23
BH2221_LD: BH2221.15 F446.20
BIAS_VCA: C37.1 R50.2 R51.2 R52.1 SUM_OPAMP.3 VCA.4
BOOT1: F446.60 R81.1
CALIB_3340A: CAL_A.P$1 R6.1 R8.1
CALIB_3340B: CAL_B.P$1 R5.1 R7.1
CALIB_IN_3340A: CAL_IN_A.P$1 F446.14
CALIB_IN_3340B: CAL_IN_B.P$1 F446.15
CAP1_VCF: C43.2 VCF1.5
CAP2_VCF: C45.2 VCF1.4
CAP3_VCF: C49.2 VCF1.16
CAP4_VCF: C52.2 VCF1.11
CV_CUTOFF: CUTOFF.P$1 CV_TM.E
CV_FREQ_3340A: CV_A.P$1 HIGH_A.E
CV_FREQ_3340B: CV_B.P$1 HIGH_B.E
CV_PWM_3340A: 3340A.5 R3.1 R4.1
CV_PWM_3340B: 3340B.5 R1.1 R2.1
CV_RES: Q.P$1 Q_TM.E Q_TM.S
CV_VCA: R58.1 VCA_CV.P$1
EXT1: EXT.1 F446.50
EXT2: EXT.2 F446.51
EXT3: EXT.3 F446.52
EXT4: EXT.4 F446.53
FEEDBACK_VCF: ADG453.2 ADG453.15 C44.1
FMLIN_3340B: C11.2 FM_B.P$1
FREQ_CTRL_3340A: 3340A.15 HIGH_A.A HIGH_A.S LOW_A.A LOW_A.S R24.1
FREQ_CTRL_3340B: 3340B.15 HIGH_B.A HIGH_B.S LOW_B.A LOW_B.S R23.1
FREQ_CV_VCF: CV_TM.S VCF1.12
GAIN1_A: 2164A.3 GAINS.8
GAIN1_B: 2164B.3 GAINS.4
GAIN2_A: 2164A.6 GAINS.5
GAIN2_B: 2164B.6 GAINS.1
GAIN3_A: 2164A.11 GAINS.6
GAIN3_B: 2164B.11 GAINS.2
GAIN4_A: 2164A.14 GAINS.7
GAIN4_B: 2164B.14 GAINS.3
GND: 0V/5V/-15V/+15V.1 0V/5V/-15V/+15V.2 3V3.C 5V.C 24C04.1 24C04.4 24C04.7 2164A.8 2164B.8 3340A.12 3340B.12 +15V.C -15V.A AD5644.3 ADG453.5 BH2221.20 C1.1 C2.1 C5.1 C6.1 C7.1 C8.1 C9.1 C10.1 C12.1 C13.1 C14.2 C15.2 C16.2 C25.1 C26.1 C27.1 C28.1 C29.1 C30.1 C31.1 C32.1 C33.1 C34.2 C37.2 C39.1 C40.2 C43.1 C45.1 C49.1 C51.2 C52.1 C53.- C54.+ C55.1 C56.1 C57.1 C58.- C59.- C60.1 C61.1 C62.- C63.2 C64.2 C65.- C66.1 C67.1 C68.1 C69.1 C70.1 C71.1 C72.1 C73.- C74.1 C75.1 C76.1 C77.1 C78.1 C79.1 C80.1 C81.1 C82.1 C83.1 C84.1 C85.1 C86.1 C87.1 C88.1 CV_TM.A F446.12 F446.18 F446.31 F446.47 F446.63 GREEN.C I2C.3 ITOV.3 JACK.1 MIDI.3 MODRING.13 R2.2 R4.2 R5.2 R6.2 R13.1 R18.2 R19.2 R27.1 R52.2 R56.2 R61.1 R66.1 R68.1 R72.2 R75.1 R81.2 RED1.C RED2.C RST.3 RST.4 STLINK.5 SUB.4 SUB.7 SUB.8 SUB.9 SUB.12 SW1.1 SW1.2 SW2.1 SW2.2 TLV75533.2 VCA.6 VCF1.3
HEADIN_OPAMP_OUT: C46.2 R69.2 SUM_CON.1 SUM_CON.2 SUM_CON.3 SUM_CON.4 SUM_CON.5 SUM_CON.6 SUM_CON.7 SUM_CON.8 SUM_OPAMP.2
IN1_MIXERA: A1.P$1 C18.1
IN1_VCF: R59.2 R62.2 VCF1.1
IN2_MIXERA: A2.P$1 C20.1
IN2_MIXERB: B2.P$1 C17.1
IN2_VCF: R64.1 R65.2 R67.1 VCF1.2
IN3_MIXERA: A3.P$1 C23.1
IN3_MIXERB: B3.P$1 C21.1
IN3_VCF: R70.1 R71.2 R74.1 VCF1.17
IN4_MIXERB: B4.P$1 C22.1
IN4_MIXERB1: B1.P$1 C19.1
IN4_VCF: R76.1 R77.2 R78.1 VCF1.18
IN_VCF: C41.2 VCF_IN.P$1
IN_VCFORDER: ADG453.1 ADG453.16 R68.2
IOUT_VCA: VCA.5 VCA_OUT.P$1
ITOV_IN: C35.1 I_SUM.1 I_SUM.3 I_SUM.5 I_SUM.7 I_SUM.9 I_SUM.11 I_SUM.13 I_SUM.15 ITOV.2 R46.1 R47.1 R48.1
LED1_PWM: F446.22 R90.1
LED2_PWM: F446.38 R89.1
LED3_PWM: F446.26 R91.1
LINEAR_CTRL_3340A: 3340A.13 R22.1 R26.1
LINEAR_CTRL_3340B: 3340B.13 R20.1 R21.1 R25.1
N$1: 2164B.4 I_SUM.10
N$2: 3340B.6 C3.2
N$3: SUB.10 SUB.14
N$4: 2164A.4 I_SUM.2
N$5: R82.2 R85.1 SW2.3 SW2.4
N$6: A4.P$1 C24.1
N$7: R83.2 R86.1 SW1.3 SW1.4
N$8: C3.1 R13.2 SYNC_B.P$1
N$9: ADG453.6 SD4.2
N$10: C25.2 R32.2
N$11: C19.2 R28.2
N$12: MODRING.14 R53.2 R56.1
N$13: C36.2 R49.2
N$14: IN9.P$1 R46.2
N$15: IN10.P$1 R47.2
N$16: ADG453.7 SD4.1
N$17: R58.2 VCA.1
N$18: ADG453.11 SD3.1
N$20: C26.2 R37.2
N$22: C27.2 R38.2
N$23: A010/9/8/7/3/4/5/6.7 BH2221.4
N$24: C28.2 R39.2
N$34: ABCD.1 AD5644.1
N$35: ABCD.2 AD5644.2
N$36: ADG453.10 SD3.2
N$37: ADG453.9 IN34.1 R72.1
N$38: 2164A.1 R45.2
N$39: ABCD.3 AD5644.4
N$40: ABCD.4 AD5644.5
N$41: SUB.2 SUB.6
N$43: C38.1 R53.1
N$44: MODRING.9 R63.2
N$45: C42.1 MODRING.16 R60.1
N$46: C42.2 R57.1
N$47: C36.1 R50.1 VCA.3
N$48: R89.2 RED1.A
N$49: R57.2 XMOD.P$1
N$50: C38.2 XIN.P$1
N$51: MODRING.10 MODRING.12 R61.2
N$52: R91.2 RED2.A
N$53: 5V.A R92.2
N$54: -15V.C R93.2
N$55: +15V.A R94.2
N$56: GREEN.A R90.2
N$57: 3V3.A R95.2
N$58: ANAIN.2 F446.16
N$59: ANAIN.1 F446.17
N$65: C21.2 R30.2
N$69: C17.2 R29.2
N$70: C22.2 R31.2
N$74: C30.2 R41.2
N$75: C29.2 R40.2
N$76: C31.2 R42.2
N$77: C32.2 R43.2
N$78: C18.2 R33.2
N$79: C23.2 R35.2
N$80: C20.2 R34.2
N$81: C24.2 R36.2
N$104: C56.2 Q1.1 R80.2
N$108: R87.2 TLV75533.5
N$109: L1.1 R87.1
N$116: C41.1 R59.1
N$171: C12.2 R23.2
N$172: C14.1 R20.2
N$173: 3340B.1 TEMCOB.A
N$174: R11.1 TEMCOB.E TEMCOB.S
N$175: C11.1 R21.2
N$176: 3340B.8 R14.2
N$301: C13.2 R24.2
N$302: C15.1 R22.2
N$303: 3340A.1 TEMCOA.A
N$304: R12.1 TEMCOA.E TEMCOA.S
N$306: 3340A.8 R15.2
N$307: 3340A.6 C4.2
NRST: C55.2 F446.7 R79.2 RST.1 RST.2 STLINK.3
OSC_IN: F446.5 R80.1
OSC_OUT: C57.2 F446.6 Q1.2
OUT1_VCF: R62.1 R64.2 VCF1.7
OUT2_VCF: ADG453.3 R67.2 R70.2 VCF1.6
OUT3_VCF: R74.2 R76.2 VCF1.15
OUT4_VCF: ADG453.14 R78.2 VCF1.10
OUT_JACK: C50.- JACK.2 JACK.3
OUT_MIXER: C35.2 ITOV.6 MIXOUT.P$1 R48.2
OUT_OPAMP: C46.1 R69.1 R73.2 SUM_OPAMP.6
OUT_POT: C50.+ R73.1 R75.2 R75.3
OUT_VCF: C44.2 R55.2 VCF_OUT.P$1
PULSE_3340A: 3340A.4 R8.2 SQU_A.P$1
PULSE_3340B: 3340B.4 R7.2 SQU_B.P$1
RES_CUR_IN_VCF: R55.1 VCF1.8
RES_CUR_VCF: Q_TM.A VCF1.9
SAW_3340A: R15.1 SAW_A.P$1
SAW_3340B: R14.1 SAW_B.P$1
SCALE_3340A: 3340A.14 R19.1
SCALE_3340B: 3340B.14 R18.1
SCL: 24C04.6 F446.61 I2C.2 R84.1
SDA: 24C04.5 F446.62 I2C.1 R88.1
SOFT_SYNC_3340A: 3340A.9 C10.2
SOFT_SYNC_3340B: 3340B.9 C9.2
SUB_IN: SUB.3 SUB_IN.P$1
SUB_OUT2: SUB2.P$1 SUB.1 SUB.13
SUB_OUT4: SUB4.P$1 SUB.15
SW1: C63.1 F446.40 R85.2
SW2: C64.1 F446.39 R86.2
SWCLK: F446.49 STLINK.4
SWDIO: F446.46 STLINK.2
SYNC_3340A: C4.1 R27.2 SYNC_A.P$1
TEMPCO2_VCOA: 3340A.2 R17.1
TEMPCO2_VCOB: 3340B.2 R16.1
TIMING_CAP_3340A: 3340A.11 C8.2
TIMING_CAP_3340B: 3340B.11 C7.2
TRI_3340A: 3340A.10 TRI_A.P$1
TRI_3340B: 3340B.10 TRI_B.P$1
USART1_RX: F446.59 MIDI.1
USART1_TX: F446.58 MIDI.2
VCA_IN: R49.1 VCA_IN.P$1
VCAP1: C60.2 F446.30
VCF_ANASW_IN4: ADG453.8 IN34.2 R66.2
VEE_VCF: C40.1 R54.2 VCF1.13
VEE_VCOA: 3340A.3 C2.2 R10.2 R12.2 R17.2
VEE_VCOB: 3340B.3 C1.2 R9.2 R11.2 R16.2